# Altium PCB PA_PShifter_R00.PcbDoc
Units mil, origin at the board's own origin, x right, y up, seen from the top; angles counter-clockwise.
Board outline 1574.8 x 1594.49 mil, 2 copper layers (Top Layer, Bottom Layer); 38 components, 29 nets, 152 pads, 520 vias.
Unrouted connection lines stored in the file: 4.
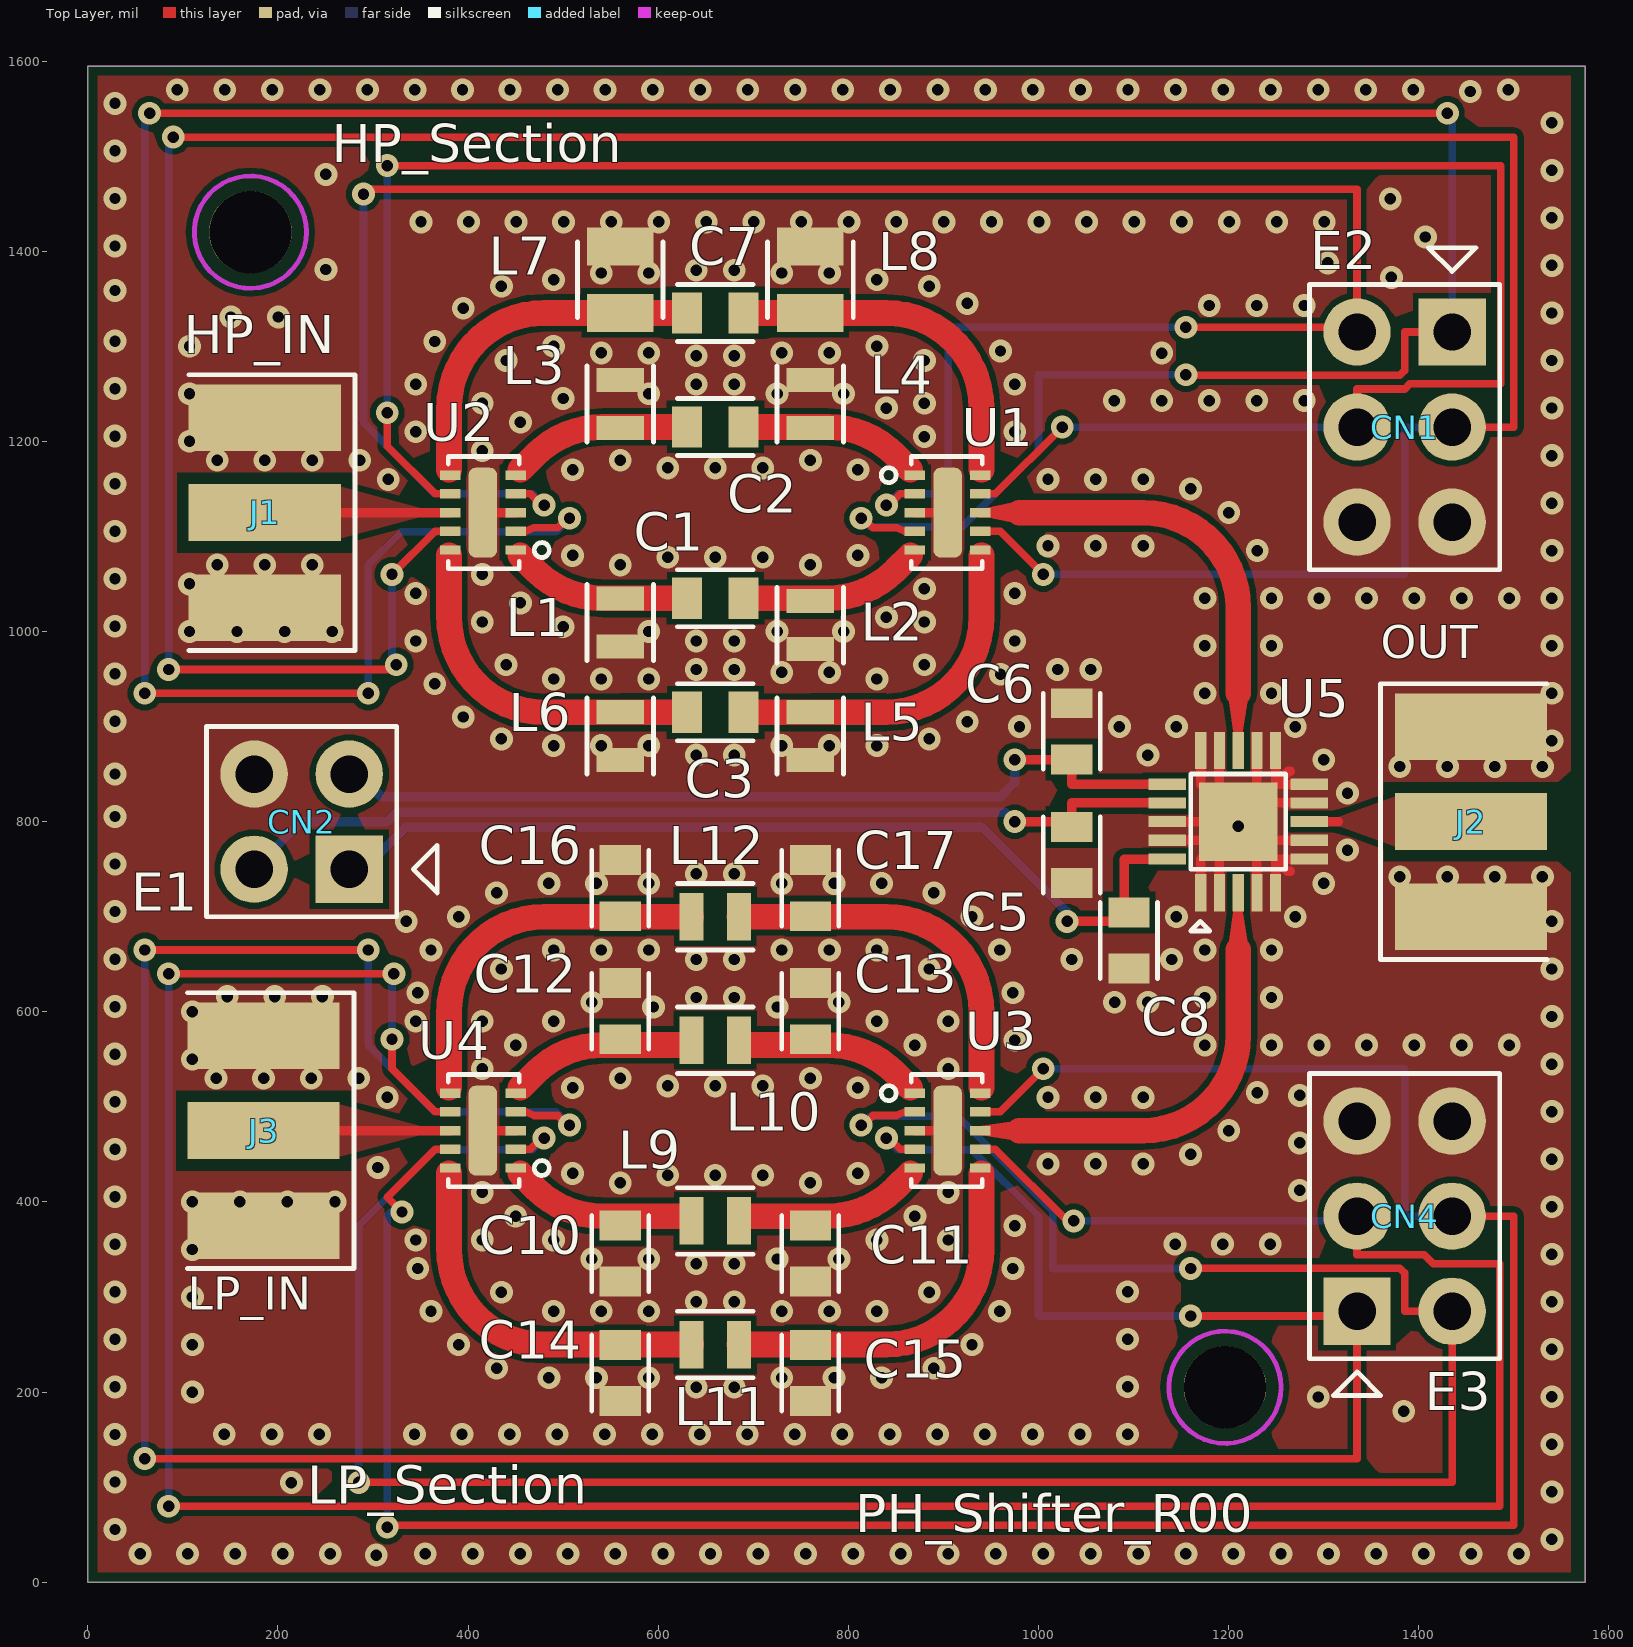
[diagram p0: Top Layer view]
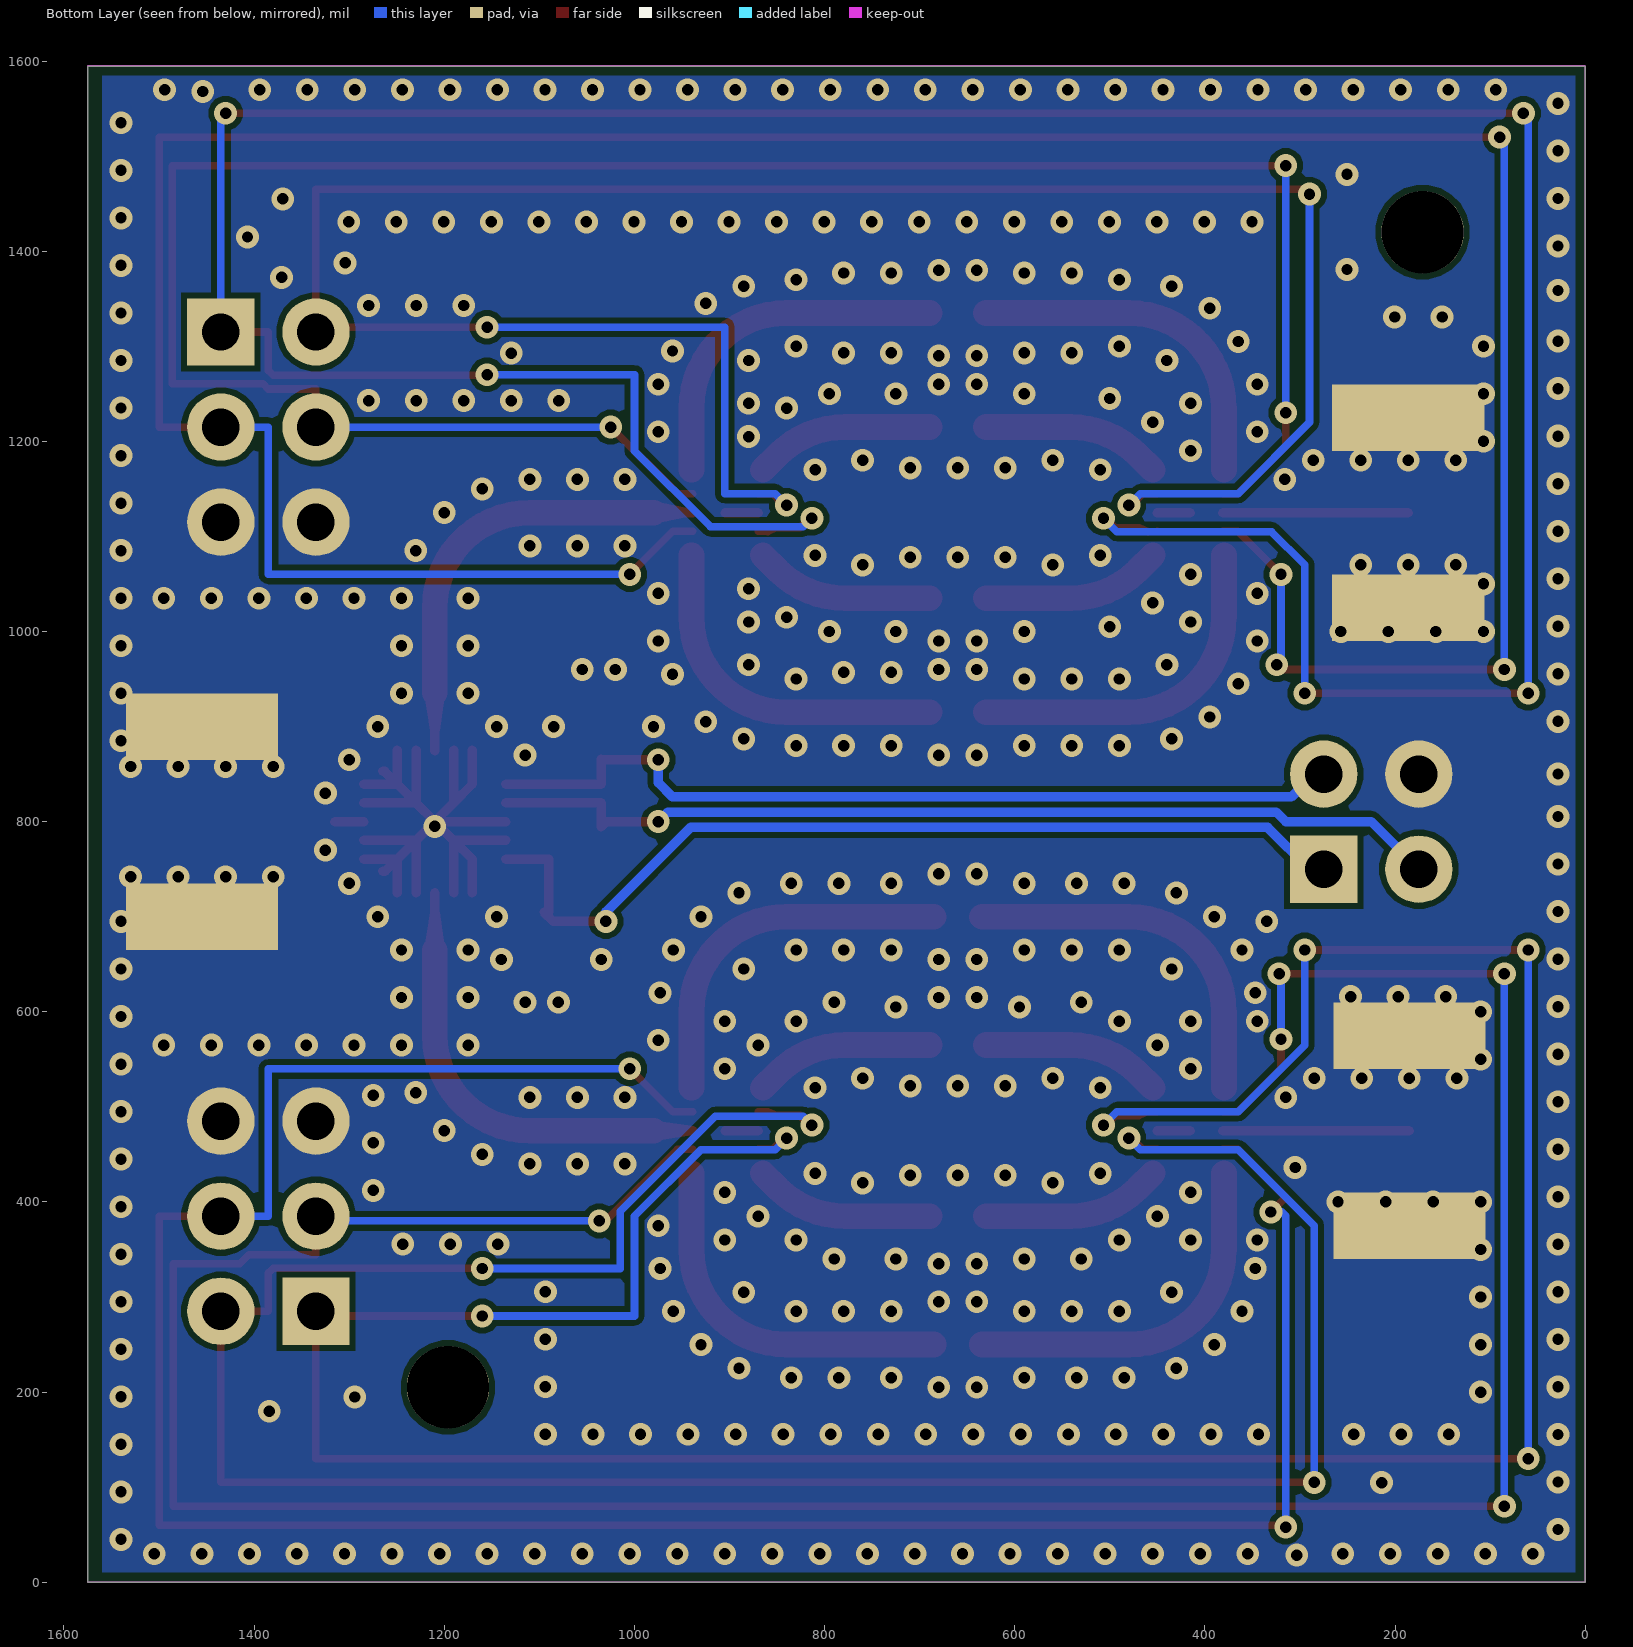
[diagram p1: Bottom Layer view, seen from below]

## Layer stack, top to bottom
Top Solder: solder mask 0.4, Solder Resist, Dk 3.5
Top Layer: signal copper 1.4
Dielectric 1: dielectric 12.6, FR-4, Dk 4.8
Bottom Layer: signal copper 1.4
Bottom Solder: solder mask 0.4, Solder Resist, Dk 3.5

## Board outline
0,0 0,1594.49 1574.8,1594.49 1574.8,0

## Design rules (kind name [scope] priority, off if disabled: settings)
AssemblyTestpoint [All] p1: testpointundercomponent=TRUE minsize=40 maxsize=100 preferedsize=60 minholesize=0 maxholesize=40 preferedholesize=32 testpointgrid=1 usegrid=TRUE gridoriginx=590.55 gridoriginy=2362.2 gridtolerance=0.01 allowsidetop=TRUE allowsidebottom=TRUE
Clearance SMA_Clearance [(HasFootprint('SMA_Connector') AND  Not InNet('GND'))] p1: gap=12 ignorepadtopadclearanceinfootprint=FALSE
Clearance Clearance_1 [OnMid vs OnMid] p2: gap=6 ignorepadtopadclearanceinfootprint=FALSE sourcerule=41 cellrowname=All cellrowtype=0 cellcolname=All cellcoltype=0 innerlayers=TRUE
Clearance Clearance_2 [(ExistsOnLayer('Top Layer') Or ExistsOnLayer('Bottom Layer')) vs (ExistsOnLayer('Top Layer') Or ExistsOnLayer('Bottom Layer'))] p3: gap=6 ignorepadtopadclearanceinfootprint=FALSE sourcerule=41 cellrowname=All cellrowtype=0 cellcolname=All cellcoltype=0 outerlayers=TRUE
Clearance [All] p4: gap=10 ignorepadtopadclearanceinfootprint=FALSE ismatrix=TRUE
FabricationTestpoint [All] p1: side=3 testpointundercomponent=TRUE minsize=40 maxsize=100 preferedsize=60 minholesize=0 maxholesize=40 preferedholesize=32 testpointgrid=1 allowsidetop=TRUE allowsidebottom=TRUE usegrid=TRUE gridoriginx=590.55 gridoriginy=2362.2 gridtolerance=0.01
PolygonConnect [All] p1: thpad.connectstyle=Relief thpad.reliefconductorwidth=10 thpad.reliefentries=4 thpad.polygonreliefangle="90 Angle" thpad.airgapwidth=10 smdpad.connectstyle=Direct smdpad.reliefconductorwidth=10 smdpad.reliefentries=4 smdpad.polygonreliefangle="90 Angle" smdpad.airgapwidth=10 via.connectstyle=Direct via.reliefconductorwidth=10 via.reliefentries=4 via.polygonreliefangle="90 Angle" via.airgapwidth=10
RoutingVias "Schematic Routing Via Style" [All] p1: holewidth=28 width=50 viastyle="Through Hole" minholewidth=28 minwidth=50 maxholewidth=28 maxwidth=50
RoutingVias RoutingViaStyle_1 [All] p2: holewidth=12 width=24 viastyle="Through Hole" minholewidth=12 minwidth=24 maxholewidth=50 maxwidth=50
RoutingVias [All] p3: holewidth=28 width=50 viastyle="Through Hole" minholewidth=28 minwidth=50 maxholewidth=28 maxwidth=50
SolderMaskExpansion [All] p1: expansion=4 istentingtop=FALSE
Width MaxMinWidth_1 [All] p1: maxlimit=100 minlimit=6 preferedwidth=27 minimp=50.000000 maximp=50.000000 favimp=50.000000
Width MaxMinWidth_2 [All] p2: maxlimit=100 minlimit=6 preferedwidth=27 minimp=50.000000 maximp=50.000000 favimp=50.000000
Width [All] p3: maxlimit=10 minlimit=10 preferedwidth=10
28 further rules are at their usual default settings.

## Components (designator, comment, footprint, x,y, rotation, side; value= is the part's Value field where it differs from the comment)
C1 "3.6pF N0P RF" C_0603 660,1035 r0 top
C2 "15pF N0P RF" C_0603 660,1215 r0 top
C3 "62pF N0P RF" C_0603 660,915 r0 top
C5 "200pF 16V C0G" C_0603 1035,765 r270 top
C6 "200pF 16V C0G" C_0603 1035,895 r90 top
C7 "240pF N0P RF" C_0603 660,1335 r0 top
C8 "0.1uF 16V X7R" C_0603 1095,675 r90 top
C10 "0.7pF N0P RF" C_0603 560,345.63 r90 top
C11 "0.7pF N0P RF" C_0603 760,345.63 r90 top
C12 "3pF N0P RF" C_0603 560,600.63 r90 top
C13 "3pF N0P RF" C_0603 760,600.63 r90 top
C14 "13pF N0P RF" C_0603 560,220 r90 top
C15 "13pF N0P RF" C_0603 760,220 r90 top
C16 "51pF N0P RF" C_0603 560,730 r90 top
C17 "51pF N0P RF" C_0603 760,730 r90 top
CN1 "CONN_06P" "Header_M_2x3_0.1\"" 1385,1215 r270 top
CN2 "CONN_04P" "Header_M_2x2_0.1\"" 225,800 r180 top
CN4 "CONN_06P" "Header_M_2x3_0.1\"" 1385,385 r90 top
J1 "SMA_Connector" SMA_Connector 186.1,1125 r90 top
J2 "SMA_Connector" SMA_Connector 1454.8,800 r270 top
J3 "SMA_Connector" SMA_Connector 185,475 r90 top
L1 "16nH RF" L_0603 560,1009.37 r90 top
L2 "16nH RF" L_0603 760,1006.63 r90 top
L3 "68nH RF" L_0603 560,1239.37 r270 top
L4 "68nH RF" L_0603 760,1239.37 r90 top
L5 "270nH RF" L_0603 760,890 r90 top
L6 "270nH RF" L_0603 560,890 r90 top
L7 "1200nH RF" L_0805 560,1370 r270 top
L8 "1200nH RF" L_0805 760,1370 r90 top
L9 "3.3nH RF" L_0603 660,380 r180 top
L10 "12nH RF" L_0603 660,570 r180 top
L11 "56nH RF" L_0603 660,250 r180 top
L12 "220nH RF" L_0603 660,700 r180 top
U1 "SP4T RF Switch" "SP4T Switch RF" 905,1129.37 r0 top
U2 "SP4T RF Switch" "SP4T Switch RF" 415,1120.63 r180 top
U3 "SP4T RF Switch" "SP4T Switch RF" 905,479.37 r0 top
U4 "SP4T RF Switch" "SP4T Switch RF" 415,470.63 r180 top
U5 "QPC6324" QFN50P400X400X90-21N-D 1210,800 r90 top

## Footprints (in the part's own frame and the unit in brackets; to place one, negate y for a bottom-side part, rotate by r counter-clockwise, add the part's x,y. Pads: shape width x height; smd on the part's side, far side on the other; paste and mask are expansions set on the pad)
C_0603 [mm] "Chip Capacitor, 2-Leads,"
  rect 0.8x1.1 smd: 1(-0.75,0) 2(0.75,0)
  silkscreen extent -1.02,-0.76 1.02,0.76, body extent -1,-0.62 1,0.63, height 0.78
"Header_M_2x2_0.1\"" [mm] "Header Male 2 x 2 Vias Pitch 100mils"
  rect 1.8x1.8 hole 1: 1(-1.27,1.27)
  round 1.8 hole 1: 2(-1.27,-1.27) 3(1.27,1.27) 4(1.27,-1.27)
  silkscreen extent -3.62,-2.54 2.54,2.54
"Header_M_2x3_0.1\"" [mm] "Header Male 2 x 3 Vias Pitch 100mils"
  rect 1.8x1.8 hole 1: 1(-2.54,1.27)
  round 1.8 hole 1: 2(-2.54,-1.27) 3(0,1.27) 4(0,-1.27) 5(2.54,1.27) 6(2.54,-1.27)
  silkscreen extent -4.79,-2.54 3.81,2.54
L_0603 [mm] "Chip Inductor, 2-Leads, Body 1.24x1.8mm"
  rect 0.64x1.27 smd: 1(-0.64,0) 2(0.64,0)
  silkscreen extent -1.02,-0.89 1.02,0.89
L_0805 [mm] "Chip Inductor, 2-Leads, Body 2.00x1.68mm"
  rect 1.02x1.78 smd: 1(-0.89,0) 2(0.889,0)
  silkscreen extent -1.02,-1.14 1.02,1.14
QFN50P400X400X90-21N-D [mm]
  rect 1x0.3 smd: 1(-1.9,1) 2(-1.9,0.5) 3(-1.9,0) 4(-1.9,-0.5) 5(-1.9,-1) 11(1.9,-1) 12(1.9,-0.5) 13(1.9,0) 14(1.9,0.5) 15(1.9,1)
  rect 0.3x1 smd: 6(-1,-1.9) 7(-0.5,-1.9) 8(0,-1.9) 9(0.5,-1.9) 10(1,-1.9) 16(1,1.9) 17(0.5,1.9) 18(0,1.9) 19(-0.5,1.9) 20(-1,1.9)
  rect 2.1x2.1 smd: 21(0,0)
  silkscreen extent -2.92,-1.27 1.27,1.27, body extent -2.05,-2.05 2.05,2.05, height 0.9
SMA_Connector [mil] "SMA PCB Connector 1.6mm / PN: EMPCB.CSMAFSTJ.A"
  rect 60x160 smd: 1(0,0)
  rect 70x160 smd: 2(-100,0) 2(100,0)
  rect 70x160 smd far side: 2(-100,0) 2(100,0)
  silkscreen extent -145,-95 145,80, body extent -121,-60 121,80, height 10
"SP4T Switch RF" [mm] "SKY13322-375LF"
  rect 0.55x0.25 smd mask+0.05: 1(-0.889,0.889) 2(-0.889,0.389) 3(-0.889,-0.111) 4(-0.889,-0.611) 5(-0.889,-1.111) 6(0.861,-1.111) 7(0.861,-0.611) 8(0.861,-0.111) 9(0.861,0.389) 10(0.861,0.889)
  rrect50% 0.76x2.4 smd mask+0.05: ""(-0.014,-0.111)
  silkscreen extent -1.79,-1.61 0.91,1.39

## Part data
C1 C2 C3 C5 C6 C7 C8 C10 C11 C12 C13 C14 C15 C16 C17: library part "Ceramic Cap"
CN1 CN2 CN4: "Connector Generic 4 Vias"
J1 J2 J3: "Connector SMA"
L1 L2 L3 L4 L5 L6 L7 L8 L9 L10 L11 L12: library part "Inductor Chip", "CHIP inductor"
U1 U2 U3 U4: "SKY13322-375LF"
U5: "SPDT RF Switch"

## Free pads (board coordinates)
  round 86.61 hole 86.61: 3(171.1,1420) 3(1196.1,205)

## Via types
v1: diameter 24, hole 12, Top Layer to Bottom Layer, tented both sides, 520 vias

## Nets (pads, with @x,y where several pads share a name; then routed paths per layer and width w, separated by ;. In a path a pad name is that pad's centre, name@x,y a point inside that pad or via, vN(x,y) a via of type N, cw(c..) or ccw(c..) an arc to the next point about the centre after c; other vN are vias at no path point)
+5V: C8.2 CN2.1 U5.20 | length 995.3
  Top Layer w10: v1(1030,695) 1085.47,695 C8.2 1090,704.53 1090,760.63 U5.20
  Bottom Layer w10: CN2.1 290,750 334,794 941,794 1030,705 v1(1030,695)
GND: C5.2 C6.2 C8.1 C10.1 C11.1 C12.2 C13.2 C14.1 C15.1 C16.2 C17.2 CN1.5 CN1.6 CN2.4 CN4.5 CN4.6 J1.2 J2.2 J3.2 L1.1 L2.1 L3.1 L4.2 L5.1 L6.1 L7.1 L8.2 U1. U1.3 U2. U2.3 U3. U3.3 U4. U4.3 U5.1 U5.2 U5.4 U5.5 U5.6 U5.7 U5.9 U5.10 U5.11 U5.12 U5.14 U5.15 U5.18 U5.19 U5.21 | length 1075
  Top Layer w10: U4. U4.3 ; U2. U2.3 ; U3.3 U3. ; U1.3 U1. ; U5.19 U5.21@1190.31,780.32 ; U5.18 U5.21 ; U5.1 1170.63,760.63 U5.21@1190.31,780.32 ; U5.15 1170.63,839.37 U5.21@1190.31,819.68 ; U5.2 U5.21@1190.31,780.32 ; U5.14 U5.21@1190.31,819.68 ; U5.4 U5.21@1229.68,780.32 ; U5.12 U5.21@1229.68,819.68 ; U5.5 U5.21@1249.37,760.63 ; U5.11 U5.21@1249.37,839.37 ; 1264.56,747.82 1262.18,747.82 U5.21@1249.37,760.63 ; 1264.56,852.82 1262.82,852.82 U5.21@1249.37,839.37 ; U5.6 U5.21@1249.37,760.63 ; U5.7 U5.21@1229.68,780.32 ; U5.9 U5.21@1229.68,819.68 ; U5.10 U5.21@1249.37,839.37 ; U5.21@1190.31,780.32 U5.21 ; U5.21@1190.31,819.68 U5.21 ; U5.21 U5.21@1229.68,819.68 ; U5.21 U5.21@1229.68,780.32 ; U5.21@1229.68,780.32 U5.21@1249.37,760.63 ; U5.21@1229.68,819.68 U5.21@1249.37,839.37
  other v1: 303.39,28.5 55,30 105,30 155,30 205,30 255,30 355,30 405,30 455,30 505,30 555,30 605,30 655,30 705,30 755,30 805,30 855,30 905,30 955,30 1005,30 1055,30 1105,30 1155,30 1205,30 1255,30 1305,30 1355,30 1405,30 1455,30 1505,30 1540,45 28.67,55.43 1540,95 214.13,104.78 28.67,105.43 1540,145 28.67,155.43 143.63,155.59 193.63,155.59 243.63,155.59 343.63,155.59 393.63,155.59 443.63,155.59 493.63,155.59 543.63,155.59 593.63,155.59 643.63,155.59 693.63,155.59 743.63,155.59 793.63,155.59 843.63,155.59 893.63,155.59 943.63,155.59 993.63,155.59 1043.63,155.59 1093.63,155.59 1384.13,179.78 1294.13,194.78 1540,195 110,200 28.67,205.43 640,205 680,205 1093.63,205.59 485,215 535,215 590,215 730,215 785,215 835,215 430,225 890,225 1540,245 110,250 390,250 930,250 28.67,255.43 1093.63,255.59 361,285 490,285 540,285 590,285 730,285 780,285 830,285 959,285 640,295 680,295 1540,295 110,300 28.67,305.43 435,305 885,305 1093.63,305.59 347,330 973,330 640,335 680,335 530,340 590,340 725,340 790,340 1540,345 110,350 28.67,355.43 1143.63,355.59 1193.63,355.59 1243.63,355.59 345,360 415,360 490,360 830,360 905,360 975,375 450,385 870,385 1540,395 110,400 160,400 210,400 260,400 28.67,405.43 415,410 905,410 1274.65,412.09 560,420 760,420 610,428 660,428 710,428 510,430 810,430 305.19,436.24 1010,440 1060,440 1110,440 1540,445 1160,450 28.67,455.43 1274.65,462.09 1200,475 1540,495 28.67,505.43 315,510 1010,510 1060,510 1110,510 1274.65,512.09 1230,515 510,520 810,520 610,522 660,522 710,522 135,530 185,530 235,530 285,530 560,530 760,530 415,540 905,540 1540,545 110,550 28.67,555.43 450,565 870,565 1175,565 1245,565 1295,565 1345,565 1395,565 1445,565 1495,565 975,570 345,590 415,590 490,590 830,590 905,590 1540,595 110,600 28.67,605.43 595,605 725,605 530,610 790,610 1080,610 1115,610 640,615 680,615 1175,615 1245,615 146.75,615.94 196.75,615.94 246.75,615.94 347,620 973,620 435,645 885,645 1540,645 28.67,655.43 640,655 680,655 1035,655 1140,655 361,665 490,665 540,665 590,665 730,665 780,665 830,665 959,665 1175,665 1245,665 335,695 1540,695 390,700 930,700 1145,700 1270,700 28.67,705.43 430,725 890,725 485,735 535,735 590,735 730,735 785,735 835,735 1300,735 1380,742 1430,742 1480,742 1530,742 640,745 680,745 28.67,755.43 1325,770 1210,795 28.67,805.43 1325,830 28.67,850.11 1380,858 1430,858 1480,858 1530,858 1300,865 640,870 680,870 1115,870 490,880 540,880 590,880 730,880 780,880 830,880 1540,885 435,887 885,887 980,900 1085,900 1145,900 1270,900 28.67,905.43 925,905 395,910 1175,935 1245,935 1540,935 365,945 490,950 540,950 590,950 830,950 28.67,955.43 960,955 730,957 780,957 640,960 680,960 1020,960 1055,960 440,965 880,965 1175,985 1245,985 1540,985 345,990 640,990 680,990 975,990 107,1000 157,1000 207,1000 257,1000 590,1000 725,1000 795,1000 28.67,1005.43 500,1005 415,1010 880,1010 840,1015.04 455,1030 1175,1035 1245,1035 1295,1035 1345,1035 1395,1035 1445,1035 1495,1035 1540,1035 345,1040 975,1040 880,1045 107,1050 28.67,1055.43 415,1060 136.1,1070 186.1,1070 236.1,1070 560,1070 760,1070 610,1078 660,1078 710,1078 510,1080 810,1080 1230,1085 1540,1085 1010,1090 1060,1090 1110,1090 28.67,1105.43 1200,1125 1540,1135 1160,1150 28.67,1155.43 316.1,1160 1010,1160 1060,1160 1110,1160 510,1170 810,1170 610,1172 660,1172 710,1172 136.1,1180 186.1,1180 236.1,1180 286.1,1180 560,1180 760,1180 1540,1185 415,1190 107,1200 28.67,1205.43 880,1205 345,1210 975,1210 455,1220 840,1234.96 1540,1235 415,1240 880,1240 1079.56,1242.82 1129.56,1242.82 1179.56,1242.82 1229.56,1242.82 1279.56,1242.82 500,1245 107,1250 590,1250 725,1250 795,1250 28.67,1255.43 345,1260 640,1260 680,1260 975,1260 440,1285 880,1285 1540,1285 640,1290 680,1290 1129.56,1292.82 540,1293 590,1293 730,1293 780,1293 960,1295 107,1300 490,1300 830,1300 28.67,1305.43 365,1305 150.52,1330.73 200.52,1330.73 1540,1335 395,1340 1179.56,1342.82 1229.56,1342.82 1279.56,1342.82 925,1345 28.67,1358.59 435,1363 885,1363 490,1370 830,1370 1371.09,1372.35 540,1377 590,1377 730,1377 780,1377 250.52,1380.73 640,1380 680,1380 1540,1385 1304.28,1387.68 28.67,1405.43 1406.96,1414.91 350.52,1430.73 400.52,1430.73 450.52,1430.73 500.52,1430.73 550.52,1430.73 600.52,1430.73 650.52,1430.73 700.52,1430.73 750.52,1430.73 800.52,1430.73 850.52,1430.73 900.52,1430.73 950.52,1430.73 1000.52,1430.73 1050.52,1430.73 1100.52,1430.73 1150.52,1430.73 1200.52,1430.73 1250.52,1430.73 1300.52,1430.73 1540,1435 28.67,1455.43 1370,1455 250.52,1480.73 1540,1485 28.67,1505.43 1540,1535 28.67,1555.43 1454.02,1567.95 94.13,1569.78 144.13,1569.78 194.13,1569.78 244.13,1569.78 294.13,1569.78 344.13,1569.78 394.13,1569.78 444.13,1569.78 494.13,1569.78 544.13,1569.78 594.13,1569.78 644.13,1569.78 694.13,1569.78 744.13,1569.78 794.13,1569.78 844.13,1569.78 894.13,1569.78 944.13,1569.78 994.13,1569.78 1044.13,1569.78 1094.13,1569.78 1144.13,1569.78 1194.13,1569.78 1244.13,1569.78 1294.13,1569.78 1344.13,1569.78 1394.13,1569.78 1494.13,1569.78
HP_CTRL: C6.1 CN2.2 U5.16 | length 926.6
  Top Layer w10: v1(975,865) 1034.53,865 C6.1 1035,839.37 U5.16
  Bottom Layer w10: CN2.2 285,850 309,826 960,826 975,841 v1(975,865)
HP_RFC: U1.8 U5.13 | length 478.4
  Top Layer w10: U1.8 980,1125 ; U5.13 1210,935
  Top Layer w27: 980,1125 1110,1125 cw(c1110,1025) 1210,1025 1210,935
HP_S1: C1.2 L2.2 U1.5 | length 189.8
  Top Layer w27: C1.2 778.58,1035 ccw(c778.58,1135) 849.29,1064.29 865,1080
HP_S2: C2.2 L4.1 U1.1 | length 189.8
  Top Layer w27: C2.2 778.58,1215 cw(c778.58,1115) 849.29,1185.71 865,1170
HP_S3: C3.2 L5.2 U1.6 | length 372.6
  Top Layer w27: C3.2 L5.2@760,915 ; L5.2@760,915.04 840,915.04 ccw(c840,1015.04) 940,1015.04 940,1080
HP_S4: C7.2 L8.1 U1.10 | length 372.6
  Top Layer w27: C7.2 760,1335 840,1334.96 cw(c840,1234.96) 940,1234.96 940,1170
LP_CTRL: C5.1 CN2.3 U5.17 | length 1016.6
  Top Layer w10: v1(975,800) 1029.53,800 C5.1 1035,819.68 U5.17
  Bottom Layer w10: CN2.3 225,800 315,800 325,810 965,810 v1(975,800)
LP_RFC: U3.8 U5.3 | length 478.4
  Top Layer w10: U3.8 980,475 ; 1210,665 U5.3
  Top Layer w27: 980,475 1110,475 ccw(c1110,575) 1210,575 1210,665
LP_S1: C11.2 L9.1 U3.5 | length 189.8
  Top Layer w27: L9.1@689.53,385 778.58,385 ccw(c778.58,485) 849.29,414.29 865,430
LP_S2: C13.1 L10.1 U3.1 | length 189.8
  Top Layer w27: L10.1@689.53,565 778.58,565 cw(c778.58,465) 849.29,535.71 865,520
LP_S3: C15.2 L11.1 U3.6 | length 391.9
  Top Layer w27: L11.1 840,250 ccw(c840,350) 940,350 940,430
LP_S4: C17.1 L12.1 U3.10 | length 391.9
  Top Layer w27: L12.1 840,700 cw(c840,600) 940,600 940,520
NetC1_1: C1.1 L1.2 U2.1 | length 189.8
  Top Layer w27: 455,1080 470.71,1064.29 ccw(c541.42,1135) 541.42,1035 C1.1
NetC2_1: C2.1 L3.2 U2.5 | length 189.8
  Top Layer w27: 455,1170 470.71,1185.71 cw(c541.42,1115) 541.42,1215 C2.1
NetC3_1: C3.1 L6.2 U2.10 | length 372.6
  Top Layer w27: 380,1080 380,1015.04 ccw(c480,1015.04) 480,915.04 L6.2@560,915.04 ; L6.2@560,915 C3.1
NetC7_1: C7.1 L7.2 U2.6 | length 372.6
  Top Layer w27: 380,1170 380,1235 cw(c480,1235) 480,1335 L7.2 C7.1
NetC10_2: C10.2 L9.2 U4.1 | length 189.8
  Top Layer w27: 455,430 470.71,414.29 ccw(c541.42,485) 541.42,385 L9.2@630.47,385
NetC12_1: C12.1 L10.2 U4.5 | length 189.8
  Top Layer w27: 455,520 470.71,535.71 cw(c541.42,465) 541.42,565 560,565 L10.2@630.47,565
NetC14_2: C14.2 L11.2 U4.10 | length 391.9
  Top Layer w27: 380,430 380,350 ccw(c480,350) 480,250 L11.2
NetC16_1: C16.1 L12.2 U4.6 | length 391.9
  Top Layer w27: 380,520 380,555.26 380,600 cw(c480,600) 480,700 L12.2
NetJ1_1: J1.1 U2.8 | length 195
  Top Layer w10: J1.1 U2.8
NetJ2_1: J2.1 U5.8 | length 30.2
  Top Layer w10: U5.8 1315,800
NetJ3_1: J3.1 U4.8 | length 196.1
  Top Layer w10: J3.1 U4.8
SIGNAL_1: CN1.1 CN4.1 U1.4 U2.2 U3.4 U4.4 | length 6996.9
  Top Layer w8: v1(60,130) 1335,130 CN4.1 1330,280 v1(1160,280) ; v1(60,665) v1(295,665) ; v1(60,935) v1(295,935) ; v1(65,1545) v1(1430,1545) ; U4.4 460,495 469.64,490.87 494.13,490.87 505,480 505.86,480.86 v1(506.67,480.86) ; U2.2 460,1105 469.64,1109.13 494.13,1109.13 505,1120 505.86,1119.14 v1(506.67,1119.14) ; v1(813.33,1119.14) 814.14,1119.14 815,1120 825.87,1109.13 850.36,1109.13 860,1105 U1.4 ; v1@845,465 854.68,455.32 U3.4 ; v1(1155,1270) 1155.43,1269.57 1379.77,1269.57 1384.63,1274.43 1385,1274.43 1385,1315 CN1.1
  Bottom Layer w8: v1(60,130) v1(60,665) ; v1(60,935) 60,1540 v1(65,1545) ; v1(295,665) 295,565 365,495 492.53,495 v1(506.67,480.86) ; v1(295,935) 295,1070 330,1105 492.53,1105 v1(506.67,1119.14) ; v1(813.33,1119.14) 822.47,1110 920,1110 1000,1190 1000,1270 v1(1155,1270) ; v1@836.08,463.21 v1(840,467.13) 852.13,455 930,455 1000,385 1000,280 v1(1160,280) ; v1(1430,1545) 1435,1540 CN1.1
SIGNAL_2: CN1.2 CN4.2 U1.2 U2.4 U3.2 U4.2 | length 5129.7
  Top Layer w8: v1(285,105) 1435,105 CN4.2 1385,285 1385,325.57 1384.63,325.57 1379.77,330.43 1160.43,330.43 v1(1160,330) ; v1(290,1460) 295,1465 1335,1465 CN1.2 1330,1320 v1(1155,1320) ; U4.2@460.32,455.32 U4.2 465.31,455.32 v1@475,465 ; U2.4@460.32,1144.68 U2.4 465.31,1144.68 v1@475,1135 ; v1(813.33,480.86) 814.14,480.86 815,480 825.87,490.87 850.36,490.87 860,495 U3.2 ; v1@845,1135 854.68,1144.68 U1.2
  Bottom Layer w8: v1(285,105) 285,375 365,455 467.87,455 v1(480,467.13) v1@483.92,463.21 ; v1(290,1460) 290,1220 365,1145 467.87,1145 v1(480,1132.87) v1@483.92,1136.79 ; v1(813.33,480.86) 822.47,490 915,490 1015,390 1015,330 v1(1160,330) ; v1@836.08,1136.79 v1(840,1132.87) 852.13,1145 905,1145 905,1320 v1(1155,1320)
SIGNAL_3: CN1.3 CN4.3 U1.7 U2.9 U3.7 U4.7 | length 6690.9
  Top Layer w8: v1(85,80) 1485,80 1485,335 1415,335 1405.57,344.43 1335,344.43 CN4.3 ; v1(85,640) 320,640 v1(322,640) ; v1(85,960) 320,960 320,960.59 v1(324.47,965.06) ; v1(90,1520) 1500,1520 1500,1215 CN1.3 ; v1(320,571.11) 320,540 365.31,494.69 U4.7 ; v1(320,1060) 365.31,1105.31 U2.9 ; U3.7 954.68,455.32 1030,380 v1(1037,380) ; U1.7 959.69,1105.31 v1(1005,1060)
  Bottom Layer w8: v1(85,80) v1(85,640) ; v1(85,960) 85,1515 v1(90,1520) ; v1(320,571.11) 320,640 v1(322,640) ; v1(320,1060) 320,965.06 v1(324.47,965.06) ; v1(1005,1060) 1385,1060 1385,1215 CN1.3 ; v1(1037,380) 1330,380 CN4.3
SIGNAL_4: CN1.4 CN4.4 U1.9 U2.7 U3.9 U4.9 | length 5101.3
  Top Layer w8: v1(315,58) 315,60 1500,60 1500,385 CN4.4 ; v1(315,1230) 315,1195 365.31,1144.68 U2.7 ; v1(315,1490) 1486,1490 1486,1260.43 1390.43,1260.43 1385,1255 1335,1255 CN1.4 ; v1(330.56,389.44) 315,405 365.31,455.32 U4.9 ; U3.9 959.69,494.69 v1(1005,540) ; U1.9 954.68,1144.68 v1(1025,1215)
  Bottom Layer w8: v1(315,58) 315,385.2 319.24,389.44 v1(330.56,389.44) ; v1(315,1230) v1(315,1490) ; v1(1005,540) 1385,540 1385,385 CN4.4 ; v1(1025,1215) CN1.4

## Polygon pours and split planes (outlines as drawn)
GND on Top Layer "TOP_GND" (solid, pour order 8): 0,1600 1560,1600 1560,0 0,0
NetJ3_1 on Top Layer "NONET_L-01_P-001" (solid, pour order 7): 256.1,505 256.1,445 352.82,470.94 352.82,479.07
NetJ1_1 on Top Layer "NONET_L-01_P-001" (solid, pour order 5): 256.1,1155 256.1,1095 352.82,1120.94 352.82,1129.07
NetJ2_1 on Top Layer "NONET_L-01_P-001" (solid, pour order 3): 1385,830 1385,770 1313.09,795.94 1313.09,804.07
GND on Bottom Layer "GND_BOT" (solid, pour order 6): 0,1600 1560,1600 1560,0 0,0

## Keep-outs
Top Layer:
  circle w5: c1196.1,205 r59.06
  circle w5: c171.1,1420 r59.06
Keep-Out Layer:
  lines w1: 0,0 1575,0 1575,1595 0,1595 0,0

## Silkscreen, mask and mechanical layers (free items; w line width, h text height)
Top Overlay:
  text "HP_Section" at 256.52,1493.39 h40
  text "E2" at 1286,1381 h40
  text "HP_IN" at 101,1292.66 h40
  text "OUT" at 1360,960.01 h60
  text "E1" at 46,706 h40
  text "LP_IN" at 105,275 h60
  text "E3" at 1406,181 h40
  text "LP_Section" at 231,82.66 h40
  text "PH_Shifter_R00" at 807.1,52.66 h40
Mechanical 1:
  the board outline again, w5

## Dimensions
1574.8,1594.49 to 0,1594.49 on Mechanical 12 (Mech12)
0,0 to 0,1594.49 on Mechanical 12 (Mech12)